# Altium PCB 175-00033, rev3, Crate Slot Power Interface .PcbDoc (part 1 of 2)
Units mm, origin at the board's own origin, x right, y up, seen from the top; angles counter-clockwise.
Board outline 152 x 100 mm, 4 copper layers (Top Layer (*.GTL), Internal Plane 1 (*.GP1), Internal Plane 2 (*.GP2), Bottom Layer (*GBL)); 20 components, 15 nets, 1077 pads, 24 vias.
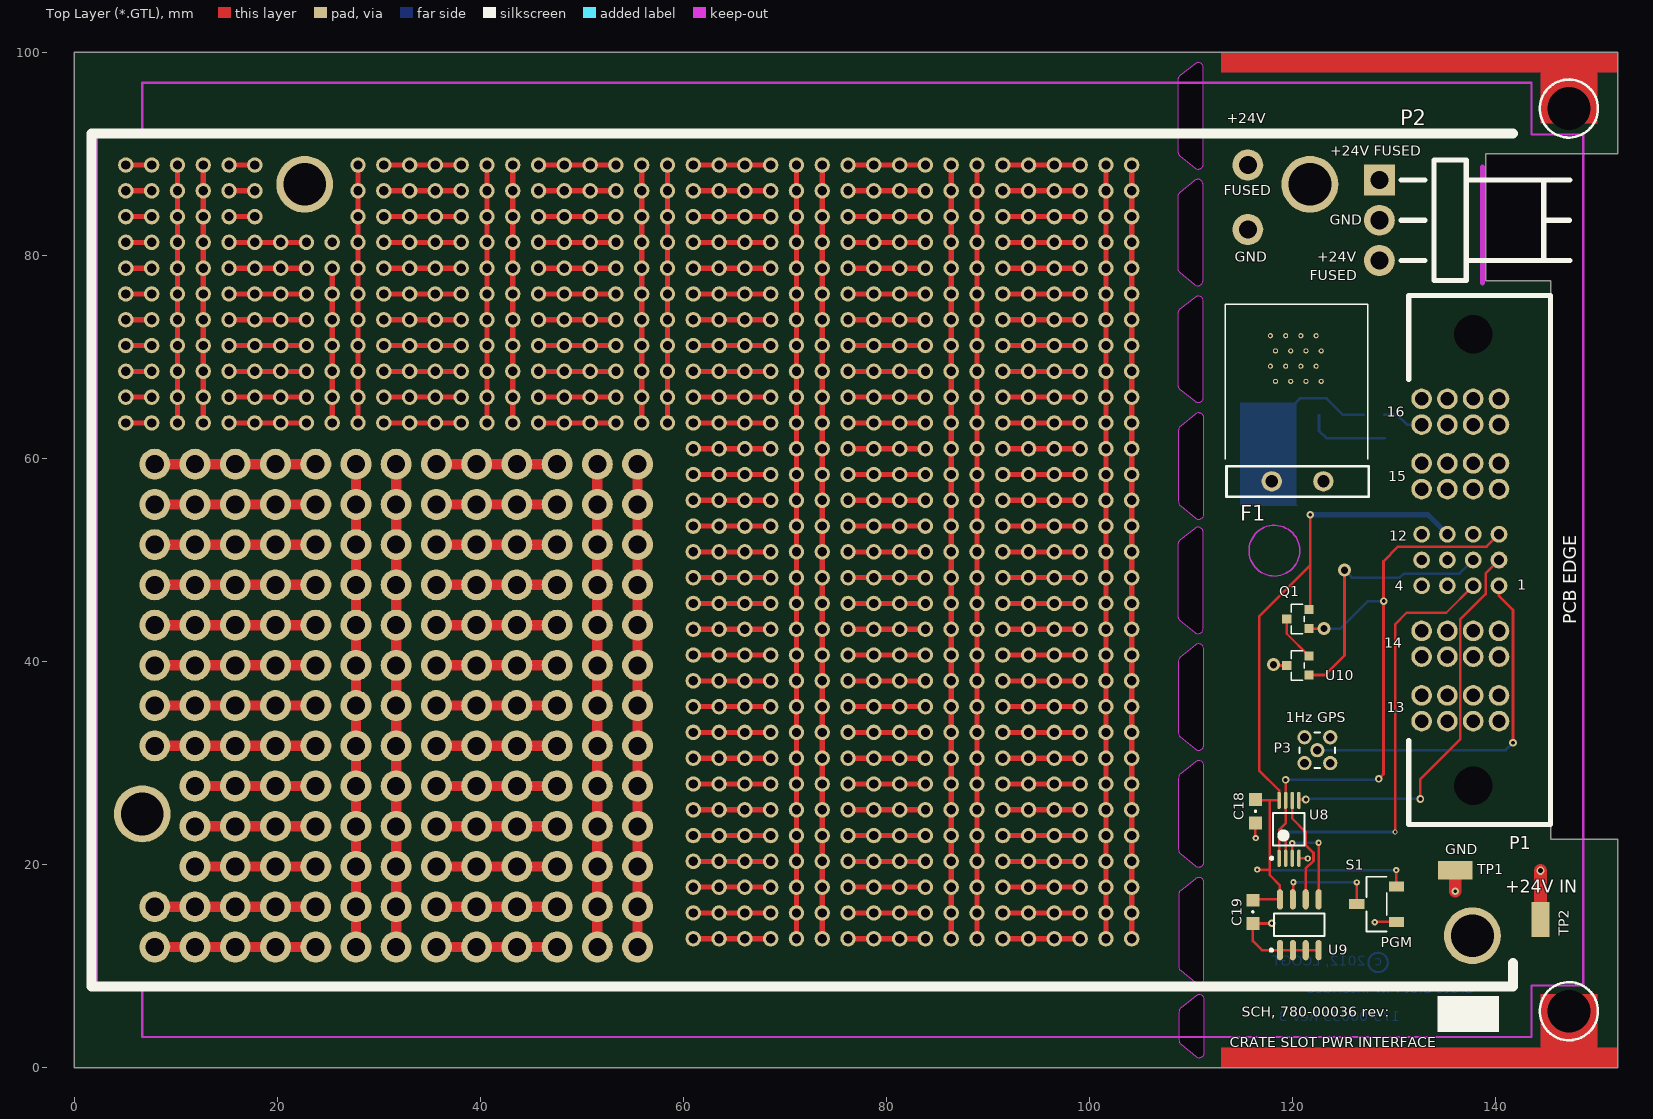
[diagram p0: Top Layer (*.GTL) view]
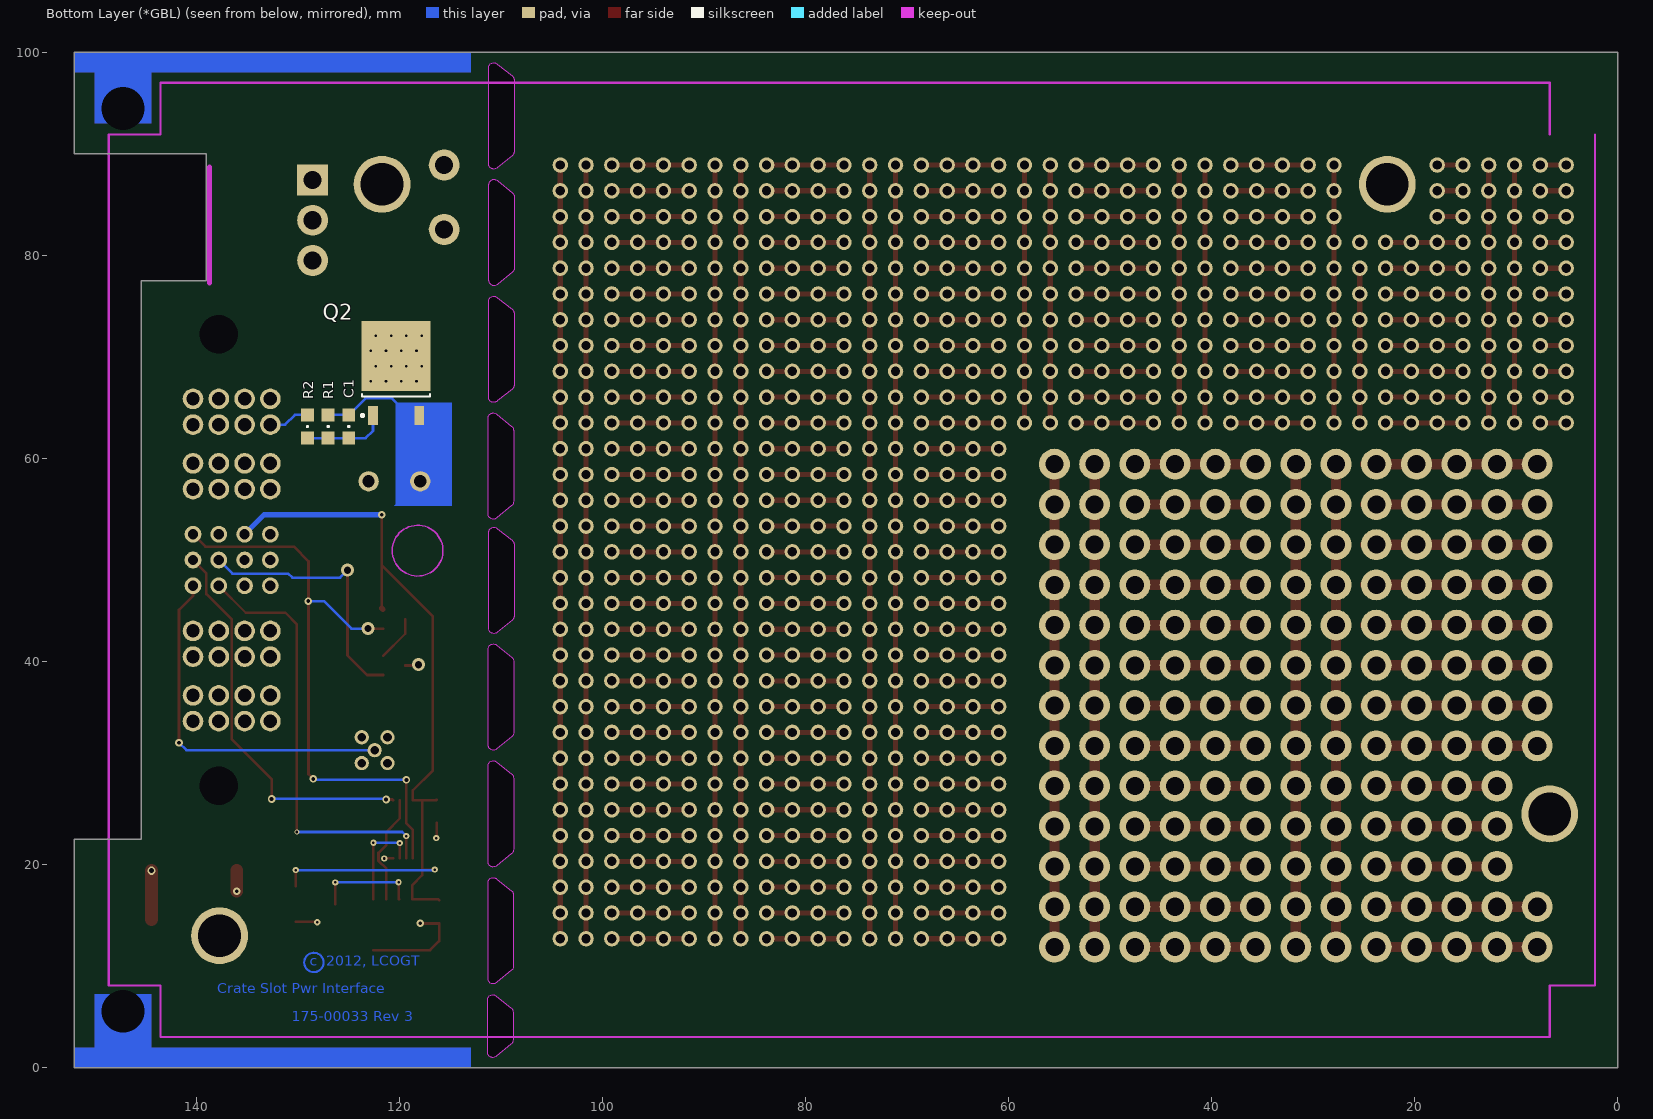
[diagram p1: Bottom Layer (*GBL) view, seen from below]
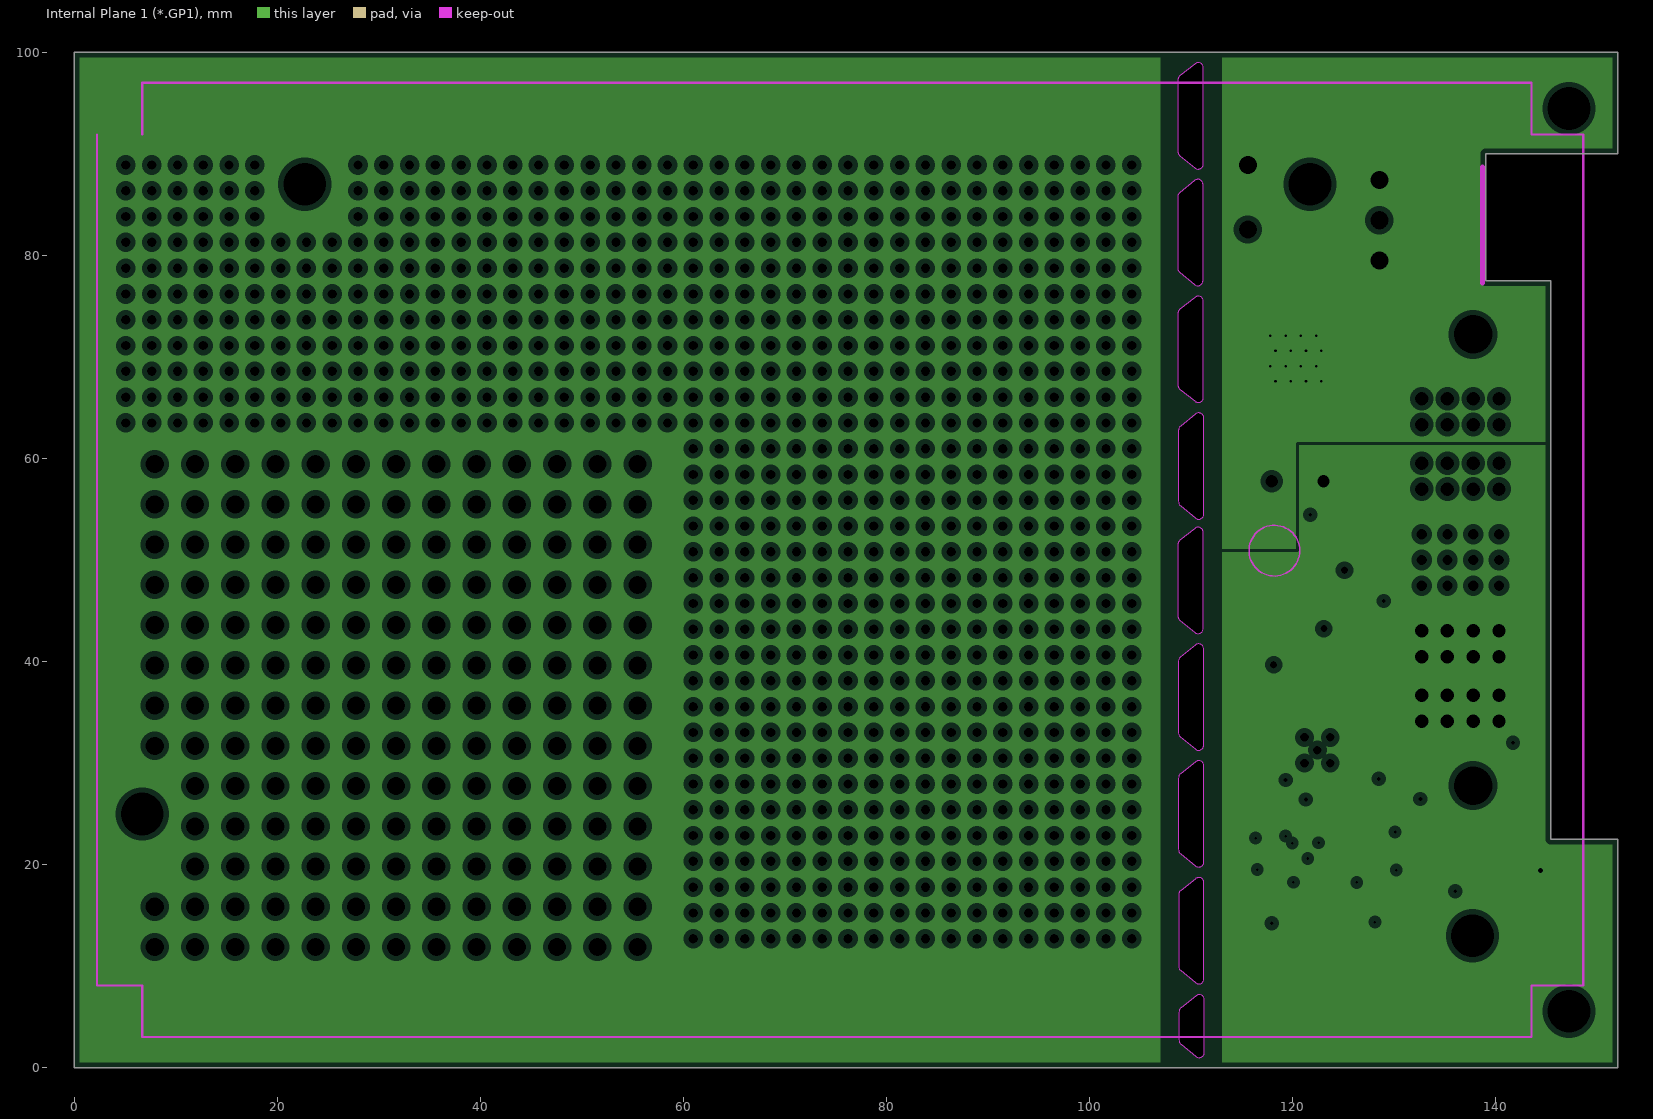
[diagram p2: Internal Plane 1 (*.GP1), clearances drawn from the general rule]
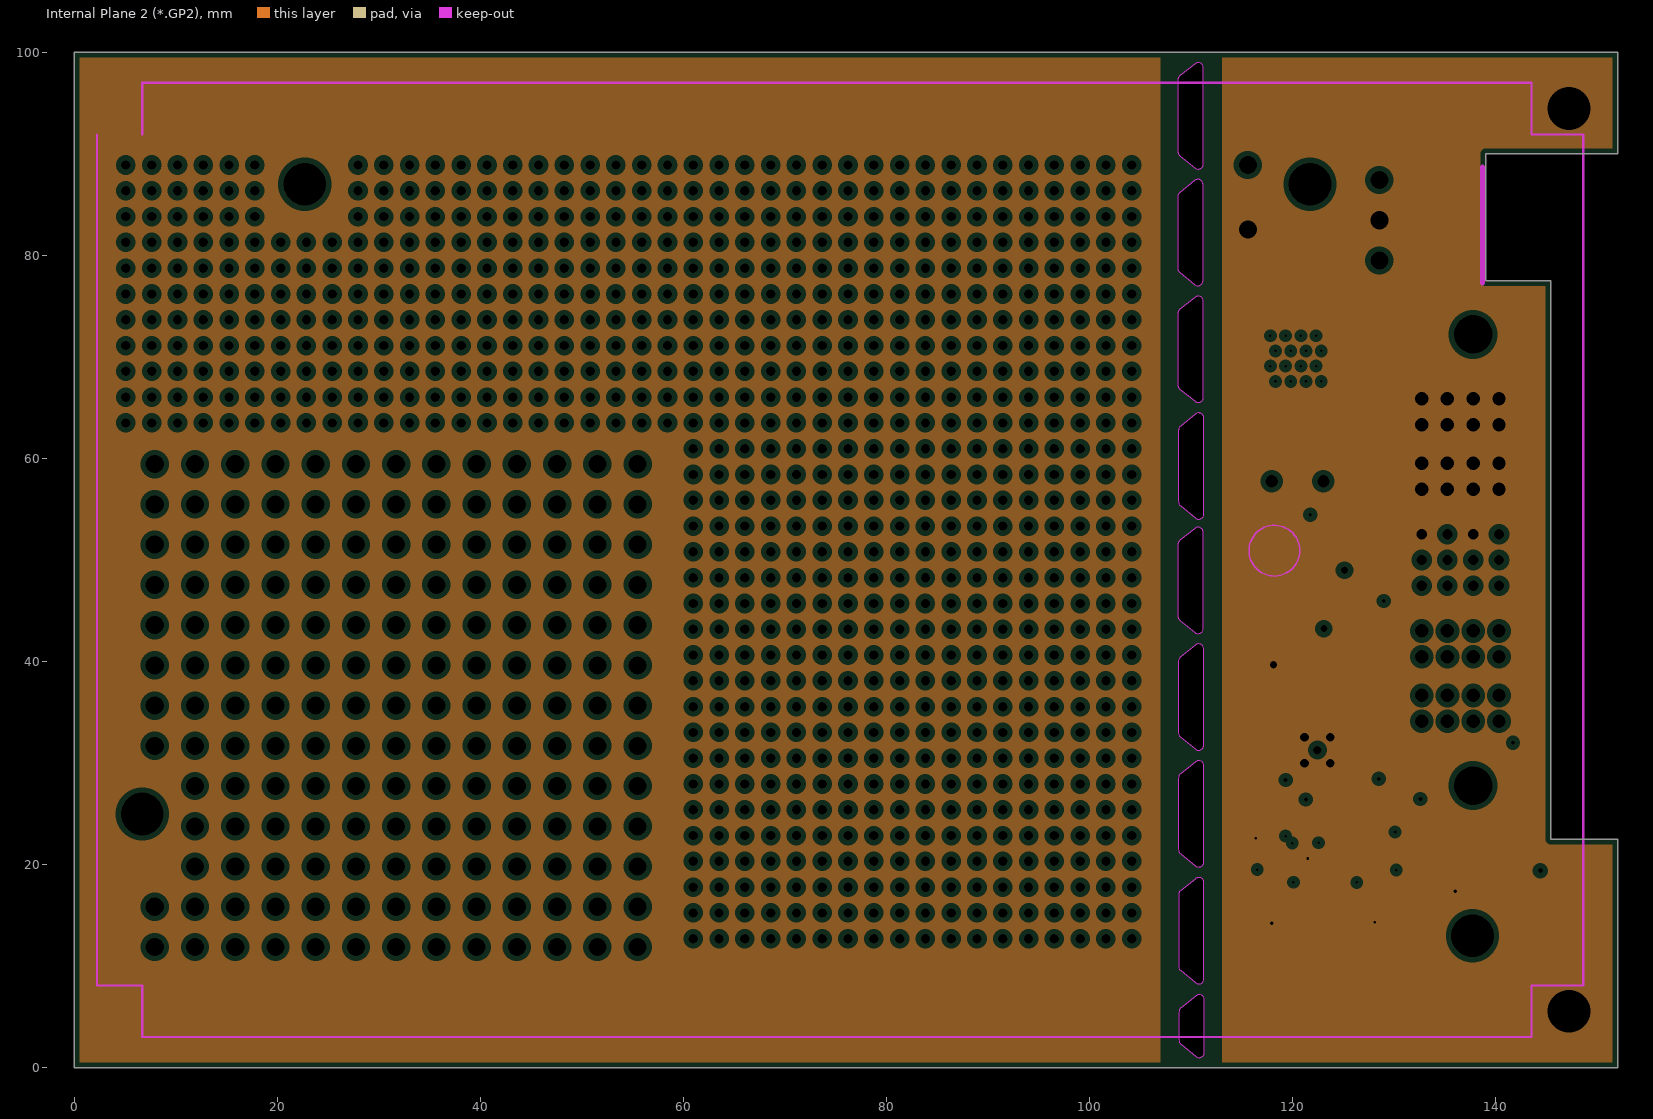
[diagram p3: Internal Plane 2 (*.GP2), clearances drawn from the general rule]

## Layer stack, top to bottom
Top Layer (*.GTL): signal copper 0.0356
Dielectric: core 0.32, FR-4, Dk 4.8
Internal Plane 1 (*.GP1): plane copper 0.0356, net (Multiple Nets)
Dielectric: prepreg 0.32, FR-4, Dk 4.8
Internal Plane 2 (*.GP2): plane copper 0.0356, net GND
Dielectric: core 0.32, FR-4, Dk 4.8
Bottom Layer (*GBL): signal copper 0.0356

## Board outline
0,0 0,100 152,100 152,90 139,90 139,77.5 145.4,77.5 145.4,22.5 152,22.5 152,0
cut-out: 108.691,90.25 ccw(c109.19,90.225) 108.893,89.824 110.335,88.648 ccw(c110.69,89) 111.19,89 111.19,98.475 ccw(c110.69,98.475) 110.335,98.828 108.893,97.672 ccw(c109.19,97.27) 108.691,97.245 108.69,97.245
cut-out: 108.662,78.762 ccw(c109.161,78.738) 108.864,78.336 110.306,77.16 ccw(c110.661,77.513) 111.161,77.513 111.161,86.988 ccw(c110.661,86.988) 110.306,87.34 108.864,86.184 ccw(c109.161,85.782) 108.662,85.757 108.661,85.757
cut-out: 108.691,67.262 ccw(c109.19,67.238) 108.893,66.836 110.335,65.66 ccw(c110.69,66.012) 111.19,66.012 111.19,75.487 ccw(c110.69,75.487) 110.335,75.84 108.893,74.684 ccw(c109.19,74.282) 108.691,74.257 108.69,74.257
cut-out: 108.746,55.762 ccw(c109.245,55.738) 108.948,55.336 110.39,54.16 ccw(c110.745,54.512) 111.245,54.512 111.245,63.987 ccw(c110.745,63.987) 110.39,64.34 108.948,63.184 ccw(c109.245,62.782) 108.746,62.757 108.745,62.757
cut-out: 108.686,44.503 ccw(c109.185,44.478) 108.888,44.076 110.33,42.9 ccw(c110.685,43.253) 111.185,43.253 111.185,52.728 ccw(c110.685,52.728) 110.33,53.08 108.888,51.924 ccw(c109.185,51.522) 108.686,51.497 108.685,51.497
cut-out: 108.731,33.012 ccw(c109.231,32.988) 108.933,32.586 110.376,31.41 ccw(c110.731,31.763) 111.231,31.763 111.231,41.238 ccw(c110.731,41.238) 110.376,41.59 108.933,40.434 ccw(c109.231,40.032) 108.731,40.007
cut-out: 108.746,21.512 ccw(c109.245,21.488) 108.948,21.086 110.39,19.91 ccw(c110.745,20.262) 111.245,20.262 111.245,29.737 ccw(c110.745,29.737) 110.39,30.09 108.948,28.934 ccw(c109.245,28.532) 108.746,28.507 108.745,28.507
cut-out: 108.753,10.003 ccw(c109.252,9.978) 108.955,9.576 110.398,8.4 ccw(c110.752,8.753) 111.252,8.753 111.252,18.228 ccw(c110.752,18.228) 110.398,18.58 108.955,17.424 ccw(c109.252,17.022) 108.753,16.997 108.752,16.997
cut-out: 108.795,2.746 ccw(c109.295,2.721) 108.997,2.319 110.44,1.143 ccw(c110.795,1.496) 111.295,1.496 111.295,6.691 ccw(c110.795,6.691) 110.44,7.044 108.997,5.887 ccw(c109.295,5.486) 108.795,5.461

## Design rules (kind name [scope] priority, off if disabled: settings)
Clearance [All] p1: gap=0.127
HoleSize [All] p1: absolutevalues=TRUE maxlimit=12.7 minlimit=0.025 maxpercent=80.000 minpercent=20.000
HoleToHoleClearance [All] p1: gap=0.076 allowstackedmicrovias=TRUE
MinimumSolderMaskSliver [All] p1: minsoldermaskwidth=0.051
PlaneClearance [All] p1: clearance=0.508
PlaneConnect [All] p1: planeconnectstyle=Direct reliefexpansion=0.508 reliefentries=4 reliefconductorwidth=0.254 reliefairgap=0.254
PolygonConnect [All] p1: connectstyle=Relief reliefconductorwidth=0.254 reliefentries=4 polygonreliefangle="90 Angle"
RoomDefinition "780-00036, rev3, Sch, Crate Slot Power Interface" [InComponentClass('780-00036, rev3, Sch, Crate Slot Power Interface')] p1: confinementstyle=ConfineIn formatcopy=TRUE lockcomponents=FALSE outline -37,-17 186.5,-17 186.5,131 -37,131
RoutingVias [All] p1: holewidth=0.254 width=0.508 viastyle="Through Hole" minholewidth=0.254 minwidth=0.508 maxholewidth=1.27 maxwidth=1.27
SilkToSilkClearance [All] p1: silktosilkclearance=0.051
SilkscreenOverComponentPads [All] p1: minsilkscreentomaskgap=0.051
SolderMaskExpansion [All] p1: expansion=0.102
Width [All] p1: maxlimit=2.54 minlimit=0.203 preferedwidth=0.254
21 further rules are at their usual default settings.

## Classes and differential pairs
component class "780-00036, rev3, Sch, Crate Slot Power Interface": +24V C1 C18 C19 F1 P1 P2 P3 Q1 Q2 R1 R2 S1 TP1 TP2 U8 U9 U10

## Components (designator, comment, footprint, x,y, rotation, side; value= is the part's Value field where it differs from the comment)
C1 "Cap SMD" SMD_0805 124.968,63.142 r90 bottom
C18 "Cap SMD" SMD_0805 116.323,25.253 r270 top
C19 "Cap SMD" SMD_0805 116.069,15.347 r270 top
Designator59 "Comment" "TARGET MECHANICAL 5" -22.047,124.333 r180 bottom
Designator60 "Comment" "TARGET MECHANICAL 5" -18.923,-41.173 r180 bottom
Designator61 "Comment" "TARGET MECHANICAL 5" 155.778,122.86 r180 bottom
F1 "RUEF400" "PolySwitch Radial 0.2" 120.472,57.747 r180 top
P1 "PETC-02-12-02--01-S-RA-SD" PETC-02-12-02-01-RA 136.5,50 r0 top locked
P2 "Header 3" "HDR 1X3 0.156\" - RT ANGLE" 128.532,87.425 r270 top
P3 "COAX MMCX" MMCX2.54-V5 122.42,31.27 r90 top
Q1 "FDV304P" SMD_SOT23_3 120.5,44.185 r90 top
Q2 "IRF5303P" "TO-252(D-PAK)  PowerPAD" 120.3,68.588 r90 bottom
R1 "Res 0805" SMD_0805 127,63.142 r90 bottom
R2 "Res 0805" SMD_0805 129.032,63.142 r270 bottom
S1 "CJS-1200TB" CAS-120B 128.261,16.109 r90 top
TP1 "Test Point SMD" "SMD_TEST POINT" 136,19.443 r180 top
TP2 "Test Point SMD" "SMD_TEST POINT" 144.39,14.58 r90 top
U8 "SN74CBT3306PWLE" PW008_N 119.625,23.475 r90 top
U9 "M24C32RMN1" SOP8_N 120.641,14.077 r90 top
U10 "DS2411" SMD_SOT23_3 120.5,39.613 r90 top

## Footprints (in the part's own frame and the unit in brackets; to place one, negate y for a bottom-side part, rotate by r counter-clockwise, add the part's x,y. Pads: shape width x height; smd on the part's side, far side on the other; paste and mask are expansions set on the pad)
CAS-120B [mm] "Copal Electronics CAS SMD Slide Switch"
  rect 1x1.5 smd: 1(-1.75,-1.95) 2(0,1.95) 3(1.75,-1.95)
  silkscreen extent -2.69,-1 2.69,1
"HDR 1X3 0.156\" - RT ANGLE" [mil] "Connector; Header; 3 Position, RT Angle"
  rect 120x120 hole 70: 1(0,0)
  round 120 hole 70: 2(156,0) 3(312,0)
  Keep-Out Layer lines w20: 400,400 -50,400
  silkscreen extent -78,85 390,739
MMCX2.54-V5 [mm] "Connector; RF Coaxial, MMCX, Thru-Hole; 5 Position; Vertical"
  round 1.4 hole 0.85: 1(0,0) 2(-1.27,-1.27) 3(1.27,-1.27) 4(1.27,1.27) 5(-1.27,1.27)
  silkscreen extent -1.75,-1.75 1.75,1.75
PETC-02-12-02-01-RA [mil] "Samtec Male Pins, PWR(4), Signal(12), Right Angle"
  round 59.06 hole 150 unplated: 0(50,-875) 0(50,875)
  round 65 hole 40: 1(150,-100) 2(50,-100) 3(-50,-100) 4(-150,-100) 5(150,0) 6(50,0) 7(-50,0) 8(-150,0) 9(150,100) 10(50,100) 11(-50,100) 12(-150,100)
  round 80 hole 52: 13(-150,-625) 13(-150,-525) 13(-50,-625) 13(-50,-525) 13(50,-625) 13(50,-525) 13(150,-625) 13(150,-525) 14(-150,-375) 14(-150,-275) 14(-50,-375) 14(-50,-275) 14(50,-375) 14(50,-275) 14(150,-375) 14(150,-275) 15(-150,275) 15(-150,375) 15(-50,275) 15(-50,375) 15(50,275) 15(50,375) 15(150,275) 15(150,375) 16(-150,525) 16(-150,625) 16(-50,525) 16(-50,625) 16(50,525) 16(50,625) 16(150,525) 16(150,625)
  silkscreen extent -200,-1025 350,1025
"PolySwitch Radial 0.2" [mm] "PolySwitch footprint"
  round 2 hole 1.2: 1(-2.54,0) 2(2.54,0)
  silkscreen extent -7,-1.5 7,1.5
PW008_N [mm] "SOP, 8-Leads, Body 3x4.4mm, Pitch 0.65mm, IPC Medium Density"
  oval 1.7x0.35 smd: 1(-2.85,0.975) 2(-2.85,0.325) 3(-2.85,-0.325) 4(-2.85,-0.975) 5(2.85,-0.975) 6(2.85,-0.325) 7(2.85,0.325) 8(2.85,0.975)
  silkscreen extent -2.97,-1.55 1.6,1.82, body extent -2.25,-1.55 2.25,1.55, height 3.1
SMD_0805 [mil]
  rect 50x50 smd: 1(-45,0) 2(45,0)
  silkscreen extent -1,-1 1,1
SMD_SOT23_3 [mil]
  rect 36x36 smd: 1(-37,-43) 2(37,-43) 3(0,43)
  silkscreen extent -57,-25 57,25
"SMD_TEST POINT" [mil] "Keystone 5015"
  rect 135x70 smd: 1(0,0)
SOP8_N [mm] "SOIC, 8-Leads, Body 4.9x3.9mm, Pitch 1.27mm, IPC Medium Density"
  oval 2x0.6 smd: 1(-2.5,1.905) 2(-2.5,0.635) 3(-2.5,-0.635) 4(-2.5,-1.905) 5(2.5,-1.905) 6(2.5,-0.635) 7(2.5,0.635) 8(2.5,1.905)
  silkscreen extent -2.62,-2.5 1.1,2.88, body extent -2,-2.5 2,2.5, height 1.75
"TARGET MECHANICAL 5" [mm]
"TO-252(D-PAK)  PowerPAD" [mil] "D-PAK, 3-Pads, Body 6.2x6.7mm (max), IPC Medium Density"
  rect 74.8x37.4 smd: 1(-171.26,89.76) 3(-171.26,-89.76)
  round 20 hole 10: 2(-39.37,-78.74) 2(-39.37,-19.69) 2(-39.37,39.37) 2(-39.37,98.43) 2(19.68,-98.43) 2(19.68,-39.37) 2(19.68,19.68) 2(19.68,78.74) 2(78.74,-78.74) 2(78.74,-19.69) 2(78.74,39.37) 2(78.74,98.43) 2(137.8,-98.43) 2(137.8,-39.37) 2(137.8,19.68) 2(137.8,78.74)
  rect 271.65x267.72 smd: 2(59.06,0)
  silkscreen extent -176,-132 -88,135, body extent -98,-132 146,132, height 94

## Part data
C1 C18 C19: "Capacitor"
F1: library part "Fuse Thermal", "PolySwitch RUE Series"
P1: "SAMTEC, SIGNAL(12)+PWR(4)"
P2: library part "Header 3, 0.156 RT ANGLE", "Header, 3-Pin, 0.156, RT ANGLE"
P3: library part COAX-M, "RF Coaxial PCB Connector, MMCX; Thru-Hole, Vertical Mount Plug,  50 Ohm Impedance"
Q1: "P-MOSFET LOGIC LEVEL"
Q2: "P-Chan MOSFET"
R1 R2: library part "Res SMD", "Resistor 0805"
S1: library part SW_SPDT_DOUG
TP1 TP2: "SMD loop test point"
U8: "Dual FET Bus Switch"
U9: "32 Kbit Serial I²C Bus EEPROM"
U10: "Silicon Serial Number"

## Free pads (board coordinates)
  round 1.524 hole 0.914: 0(5.08,63.5) 0(5.08,66.04) 0(5.08,68.58) 0(5.08,71.12) 0(5.08,73.66) 0(5.08,76.2) 0(5.08,78.74) 0(5.08,81.28) 0(5.08,83.82) 0(5.08,86.36) 0(5.08,88.9) 0(7.62,63.5) 0(7.62,66.04) 0(7.62,68.58) 0(7.62,71.12) 0(7.62,73.66) 0(7.62,76.2) 0(7.62,78.74) 0(7.62,81.28) 0(7.62,83.82) 0(7.62,86.36) 0(7.62,88.9) 0(10.16,63.5) 0(10.16,66.04) 0(10.16,68.58) 0(10.16,71.12) 0(10.16,73.66) 0(10.16,76.2) 0(10.16,78.74) 0(10.16,81.28) 0(10.16,83.82) 0(10.16,86.36) 0(10.16,88.9) 0(12.7,63.5) 0(12.7,66.04) 0(12.7,68.58) 0(12.7,71.12) 0(12.7,73.66) 0(12.7,76.2) 0(12.7,78.74) 0(12.7,81.28) 0(12.7,83.82) 0(12.7,86.36) 0(12.7,88.9) 0(15.24,63.5) 0(15.24,66.04) 0(15.24,68.58) 0(15.24,71.12) 0(15.24,73.66) 0(15.24,76.2) 0(15.24,78.74) 0(15.24,81.28) 0(15.24,83.82) 0(15.24,86.36) 0(15.24,88.9) 0(17.78,63.5) 0(17.78,66.04) 0(17.78,68.58) 0(17.78,71.12) 0(17.78,73.66) 0(17.78,76.2) 0(17.78,78.74) 0(17.78,81.28) 0(17.78,83.82) 0(17.78,86.36) 0(17.78,88.9) 0(20.32,63.5) 0(20.32,66.04) 0(20.32,68.58) 0(20.32,71.12) 0(20.32,73.66) 0(20.32,76.2) 0(20.32,78.74) 0(20.32,81.28) 0(22.86,63.5) 0(22.86,66.04) 0(22.86,68.58) 0(22.86,71.12) 0(22.86,73.66) 0(22.86,76.2) 0(22.86,78.74) 0(22.86,81.28) 0(25.4,63.5) 0(25.4,66.04) 0(25.4,68.58) 0(25.4,71.12) 0(25.4,73.66) 0(25.4,76.2) 0(25.4,78.74) 0(25.4,81.28) 0(27.94,63.5) 0(27.94,66.04) 0(27.94,68.58) 0(27.94,71.12) 0(27.94,73.66) 0(27.94,76.2) 0(27.94,78.74) 0(27.94,81.28) 0(27.94,83.82) 0(27.94,86.36) 0(27.94,88.9) 0(30.48,63.5) 0(30.48,66.04) 0(30.48,68.58) 0(30.48,71.12) 0(30.48,73.66) 0(30.48,76.2) 0(30.48,78.74) 0(30.48,81.28) 0(30.48,83.82) 0(30.48,86.36) 0(30.48,88.9) 0(33.02,63.5) 0(33.02,66.04) 0(33.02,68.58) 0(33.02,71.12) 0(33.02,73.66) 0(33.02,76.2) 0(33.02,78.74) 0(33.02,81.28) 0(33.02,83.82) 0(33.02,86.36) 0(33.02,88.9) 0(35.56,63.5) 0(35.56,66.04) 0(35.56,68.58) 0(35.56,71.12) 0(35.56,73.66) 0(35.56,76.2) 0(35.56,78.74) 0(35.56,81.28) 0(35.56,83.82) 0(35.56,86.36) 0(35.56,88.9) 0(38.1,63.5) 0(38.1,66.04) 0(38.1,68.58) 0(38.1,71.12) 0(38.1,73.66) 0(38.1,76.2) 0(38.1,78.74) 0(38.1,81.28) 0(38.1,83.82) 0(38.1,86.36) 0(38.1,88.9) 0(40.64,63.5) 0(40.64,66.04) 0(40.64,68.58) 0(40.64,71.12) 0(40.64,73.66) 0(40.64,76.2) 0(40.64,78.74) 0(40.64,81.28) 0(40.64,83.82) 0(40.64,86.36) 0(40.64,88.9) 0(43.18,63.5) 0(43.18,66.04) 0(43.18,68.58) 0(43.18,71.12) 0(43.18,73.66) 0(43.18,76.2) 0(43.18,78.74) 0(43.18,81.28) 0(43.18,83.82) 0(43.18,86.36) 0(43.18,88.9) 0(45.72,63.5) 0(45.72,66.04) 0(45.72,68.58) 0(45.72,71.12) 0(45.72,73.66) 0(45.72,76.2) 0(45.72,78.74) 0(45.72,81.28) 0(45.72,83.82) 0(45.72,86.36) 0(45.72,88.9) 0(48.26,63.5) 0(48.26,66.04) 0(48.26,68.58) 0(48.26,71.12) 0(48.26,73.66) 0(48.26,76.2) 0(48.26,78.74) 0(48.26,81.28) 0(48.26,83.82) 0(48.26,86.36) 0(48.26,88.9) 0(50.8,63.5) 0(50.8,66.04) 0(50.8,68.58) 0(50.8,71.12) 0(50.8,73.66) 0(50.8,76.2) 0(50.8,78.74) 0(50.8,81.28) 0(50.8,83.82) 0(50.8,86.36) 0(50.8,88.9) 0(53.34,63.5) 0(53.34,66.04) 0(53.34,68.58) 0(53.34,71.12) 0(53.34,73.66) 0(53.34,76.2) 0(53.34,78.74) 0(53.34,81.28) 0(53.34,83.82) 0(53.34,86.36) 0(53.34,88.9) 0(55.88,63.5) 0(55.88,66.04) 0(55.88,68.58) 0(55.88,71.12) 0(55.88,73.66) 0(55.88,76.2) 0(55.88,78.74) 0(55.88,81.28) 0(55.88,83.82) 0(55.88,86.36) 0(55.88,88.9) 0(58.42,63.5) 0(58.42,66.04) 0(58.42,68.58) 0(58.42,71.12) 0(58.42,73.66) 0(58.42,76.2) 0(58.42,78.74) 0(58.42,81.28) 0(58.42,83.82) 0(58.42,86.36) 0(58.42,88.9) 0(60.96,12.7) 0(60.96,15.24) 0(60.96,17.78) 0(60.96,20.32) 0(60.96,22.86) 0(60.96,25.4) 0(60.96,27.94) 0(60.96,30.48) 0(60.96,33.02) 0(60.96,35.56) 0(60.96,38.1) 0(60.96,40.64) 0(60.96,43.18) 0(60.96,45.72) 0(60.96,48.26) 0(60.96,50.8) 0(60.96,53.34) 0(60.96,55.88) 0(60.96,58.42) 0(60.96,60.96) 0(60.96,63.5) 0(60.96,66.04) 0(60.96,68.58) 0(60.96,71.12) 0(60.96,73.66) 0(60.96,76.2) 0(60.96,78.74) 0(60.96,81.28) 0(60.96,83.82) 0(60.96,86.36) 0(60.96,88.9) 0(63.5,12.7) 0(63.5,15.24) 0(63.5,17.78) 0(63.5,20.32) 0(63.5,22.86) 0(63.5,25.4) 0(63.5,27.94) 0(63.5,30.48) 0(63.5,33.02) 0(63.5,35.56) 0(63.5,38.1) 0(63.5,40.64) 0(63.5,43.18) 0(63.5,45.72) 0(63.5,48.26) 0(63.5,50.8) 0(63.5,53.34) 0(63.5,55.88) 0(63.5,58.42) 0(63.5,60.96) 0(63.5,63.5) 0(63.5,66.04) 0(63.5,68.58) 0(63.5,71.12) 0(63.5,73.66) 0(63.5,76.2) 0(63.5,78.74) 0(63.5,81.28) 0(63.5,83.82) 0(63.5,86.36) 0(63.5,88.9) 0(66.04,12.7) 0(66.04,15.24) 0(66.04,17.78) 0(66.04,20.32) 0(66.04,22.86) 0(66.04,25.4) 0(66.04,27.94) 0(66.04,30.48) 0(66.04,33.02) 0(66.04,35.56) 0(66.04,38.1) 0(66.04,40.64) 0(66.04,43.18) 0(66.04,45.72) 0(66.04,48.26) 0(66.04,50.8) 0(66.04,53.34) 0(66.04,55.88) 0(66.04,58.42) 0(66.04,60.96) 0(66.04,63.5) 0(66.04,66.04) 0(66.04,68.58) 0(66.04,71.12) 0(66.04,73.66) 0(66.04,76.2) 0(66.04,78.74) 0(66.04,81.28) 0(66.04,83.82) 0(66.04,86.36) 0(66.04,88.9) 0(68.58,12.7) 0(68.58,15.24) 0(68.58,17.78) 0(68.58,20.32) 0(68.58,22.86) 0(68.58,25.4) 0(68.58,27.94) 0(68.58,30.48) 0(68.58,33.02) 0(68.58,35.56) 0(68.58,38.1) 0(68.58,40.64) 0(68.58,43.18) 0(68.58,45.72) 0(68.58,48.26) 0(68.58,50.8) 0(68.58,53.34) 0(68.58,55.88) 0(68.58,58.42) 0(68.58,60.96) 0(68.58,63.5) 0(68.58,66.04) 0(68.58,68.58) 0(68.58,71.12) 0(68.58,73.66) 0(68.58,76.2) 0(68.58,78.74) 0(68.58,81.28) 0(68.58,83.82) 0(68.58,86.36) 0(68.58,88.9) 0(71.12,12.7) 0(71.12,15.24) 0(71.12,17.78) 0(71.12,20.32) 0(71.12,22.86) 0(71.12,25.4) 0(71.12,27.94) 0(71.12,30.48) 0(71.12,33.02) 0(71.12,35.56) 0(71.12,38.1) 0(71.12,40.64) 0(71.12,43.18) 0(71.12,45.72) 0(71.12,48.26) 0(71.12,50.8) 0(71.12,53.34) 0(71.12,55.88) 0(71.12,58.42) 0(71.12,60.96) 0(71.12,63.5) 0(71.12,66.04) 0(71.12,68.58) 0(71.12,71.12) 0(71.12,73.66) 0(71.12,76.2) 0(71.12,78.74) 0(71.12,81.28) 0(71.12,83.82) 0(71.12,86.36) 0(71.12,88.9) 0(73.66,12.7) 0(73.66,15.24) 0(73.66,17.78) 0(73.66,20.32) 0(73.66,22.86) 0(73.66,25.4) 0(73.66,27.94) 0(73.66,30.48) 0(73.66,33.02) 0(73.66,35.56) 0(73.66,38.1) 0(73.66,40.64) 0(73.66,43.18) 0(73.66,45.72) 0(73.66,48.26) 0(73.66,50.8) 0(73.66,53.34) 0(73.66,55.88) 0(73.66,58.42) 0(73.66,60.96) 0(73.66,63.5) 0(73.66,66.04) 0(73.66,68.58) 0(73.66,71.12) 0(73.66,73.66) 0(73.66,76.2) 0(73.66,78.74) 0(73.66,81.28) 0(73.66,83.82) 0(73.66,86.36) 0(73.66,88.9) 0(76.2,12.7) 0(76.2,15.24) 0(76.2,17.78) 0(76.2,20.32) 0(76.2,22.86) 0(76.2,25.4) 0(76.2,27.94) 0(76.2,30.48) 0(76.2,33.02) 0(76.2,35.56) 0(76.2,38.1) 0(76.2,40.64) 0(76.2,43.18) 0(76.2,45.72) 0(76.2,48.26) 0(76.2,50.8) 0(76.2,53.34) 0(76.2,55.88) 0(76.2,58.42) 0(76.2,60.96) 0(76.2,63.5) 0(76.2,66.04) 0(76.2,68.58) 0(76.2,71.12) 0(76.2,73.66) 0(76.2,76.2) 0(76.2,78.74) 0(76.2,81.28) 0(76.2,83.82) 0(76.2,86.36) 0(76.2,88.9) 0(78.74,12.7) 0(78.74,15.24) 0(78.74,17.78) 0(78.74,20.32) 0(78.74,22.86) 0(78.74,25.4) 0(78.74,27.94) 0(78.74,30.48) 0(78.74,33.02) 0(78.74,35.56) 0(78.74,38.1) 0(78.74,40.64) 0(78.74,43.18) 0(78.74,45.72) 0(78.74,48.26) 0(78.74,50.8) 0(78.74,53.34) 0(78.74,55.88) 0(78.74,58.42) 0(78.74,60.96) 0(78.74,63.5) 0(78.74,66.04) 0(78.74,68.58) 0(78.74,71.12) 0(78.74,73.66) 0(78.74,76.2) 0(78.74,78.74) 0(78.74,81.28) 0(78.74,83.82) 0(78.74,86.36) 0(78.74,88.9) 0(81.28,12.7) 0(81.28,15.24) 0(81.28,17.78) 0(81.28,20.32) 0(81.28,22.86) 0(81.28,25.4) 0(81.28,27.94) 0(81.28,30.48) 0(81.28,33.02) 0(81.28,35.56) 0(81.28,38.1) 0(81.28,40.64) 0(81.28,43.18) 0(81.28,45.72) 0(81.28,48.26) 0(81.28,50.8) 0(81.28,53.34) 0(81.28,55.88) 0(81.28,58.42) 0(81.28,60.96) 0(81.28,63.5) 0(81.28,66.04) 0(81.28,68.58) 0(81.28,71.12) 0(81.28,73.66) 0(81.28,76.2) 0(81.28,78.74) 0(81.28,81.28) 0(81.28,83.82) 0(81.28,86.36) 0(81.28,88.9) 0(83.82,12.7) 0(83.82,15.24) 0(83.82,17.78) 0(83.82,20.32) 0(83.82,22.86) 0(83.82,25.4) 0(83.82,27.94) 0(83.82,30.48) 0(83.82,33.02) 0(83.82,35.56) 0(83.82,38.1) 0(83.82,40.64) 0(83.82,43.18) 0(83.82,45.72) 0(83.82,48.26) 0(83.82,50.8) 0(83.82,53.34) 0(83.82,55.88) 0(83.82,58.42) 0(83.82,60.96) 0(83.82,63.5) 0(83.82,66.04) 0(83.82,68.58) 0(83.82,71.12) 0(83.82,73.66) 0(83.82,76.2) 0(83.82,78.74) 0(83.82,81.28) 0(83.82,83.82) 0(83.82,86.36) 0(83.82,88.9) 0(86.36,12.7) 0(86.36,15.24) 0(86.36,17.78) 0(86.36,20.32) 0(86.36,22.86) 0(86.36,25.4) 0(86.36,27.94) 0(86.36,30.48) 0(86.36,33.02) 0(86.36,35.56) 0(86.36,38.1) 0(86.36,40.64) 0(86.36,43.18) 0(86.36,45.72) 0(86.36,48.26) 0(86.36,50.8) 0(86.36,53.34) 0(86.36,55.88) 0(86.36,58.42) 0(86.36,60.96) 0(86.36,63.5) 0(86.36,66.04) 0(86.36,68.58) 0(86.36,71.12) 0(86.36,73.66) 0(86.36,76.2) 0(86.36,78.74) 0(86.36,81.28) 0(86.36,83.82) 0(86.36,86.36) 0(86.36,88.9) 0(88.9,12.7) 0(88.9,15.24) 0(88.9,17.78) 0(88.9,20.32) 0(88.9,22.86) 0(88.9,25.4) 0(88.9,27.94) 0(88.9,30.48) 0(88.9,33.02) 0(88.9,35.56) 0(88.9,38.1) 0(88.9,40.64) 0(88.9,43.18) 0(88.9,45.72) 0(88.9,48.26) 0(88.9,50.8) 0(88.9,53.34) 0(88.9,55.88) 0(88.9,58.42) 0(88.9,60.96) 0(88.9,63.5) 0(88.9,66.04) 0(88.9,68.58) 0(88.9,71.12) 0(88.9,73.66) 0(88.9,76.2) 0(88.9,78.74) 0(88.9,81.28) 0(88.9,83.82) 0(88.9,86.36) 0(88.9,88.9) 0(91.44,12.7) 0(91.44,15.24) 0(91.44,17.78) 0(91.44,20.32) 0(91.44,22.86) 0(91.44,25.4) 0(91.44,27.94) 0(91.44,30.48) 0(91.44,33.02) 0(91.44,35.56) 0(91.44,38.1) 0(91.44,40.64) 0(91.44,43.18) 0(91.44,45.72) 0(91.44,48.26) 0(91.44,50.8) 0(91.44,53.34) 0(91.44,55.88) 0(91.44,58.42) 0(91.44,60.96) 0(91.44,63.5) 0(91.44,66.04) 0(91.44,68.58) 0(91.44,71.12) 0(91.44,73.66) 0(91.44,76.2) 0(91.44,78.74) 0(91.44,81.28) 0(91.44,83.82) 0(91.44,86.36) 0(91.44,88.9) 0(93.98,12.7) 0(93.98,15.24) 0(93.98,17.78) 0(93.98,20.32) 0(93.98,22.86) 0(93.98,25.4) 0(93.98,27.94) 0(93.98,30.48) 0(93.98,33.02) 0(93.98,35.56) 0(93.98,38.1) 0(93.98,40.64) 0(93.98,43.18) 0(93.98,45.72) 0(93.98,48.26) 0(93.98,50.8) 0(93.98,53.34) 0(93.98,55.88) 0(93.98,58.42) 0(93.98,60.96) 0(93.98,63.5) 0(93.98,66.04) 0(93.98,68.58) 0(93.98,71.12) 0(93.98,73.66) 0(93.98,76.2) 0(93.98,78.74) 0(93.98,81.28) 0(93.98,83.82) 0(93.98,86.36) 0(93.98,88.9) 0(96.52,12.7) 0(96.52,15.24) 0(96.52,17.78) 0(96.52,20.32) 0(96.52,22.86) 0(96.52,25.4) 0(96.52,27.94) 0(96.52,30.48) 0(96.52,33.02) 0(96.52,35.56) 0(96.52,38.1) 0(96.52,40.64) 0(96.52,43.18) 0(96.52,45.72) 0(96.52,48.26) 0(96.52,50.8) 0(96.52,53.34) 0(96.52,55.88) 0(96.52,58.42) 0(96.52,60.96) 0(96.52,63.5) 0(96.52,66.04) 0(96.52,68.58) 0(96.52,71.12) 0(96.52,73.66) 0(96.52,76.2) 0(96.52,78.74) 0(96.52,81.28) 0(96.52,83.82) 0(96.52,86.36) 0(96.52,88.9) 0(99.06,12.7) 0(99.06,15.24) 0(99.06,17.78) 0(99.06,20.32) 0(99.06,22.86) 0(99.06,25.4) 0(99.06,27.94) 0(99.06,30.48) 0(99.06,33.02) 0(99.06,35.56) 0(99.06,38.1) 0(99.06,40.64) 0(99.06,43.18) 0(99.06,45.72) 0(99.06,48.26) 0(99.06,50.8) 0(99.06,53.34) 0(99.06,55.88) 0(99.06,58.42) 0(99.06,60.96) 0(99.06,63.5) 0(99.06,66.04) 0(99.06,68.58) 0(99.06,71.12) 0(99.06,73.66) 0(99.06,76.2) 0(99.06,78.74) 0(99.06,81.28) 0(99.06,83.82) 0(99.06,86.36) 0(99.06,88.9) 0(101.6,12.7) 0(101.6,15.24) 0(101.6,17.78) 0(101.6,20.32) 0(101.6,22.86) 0(101.6,25.4) 0(101.6,27.94) 0(101.6,30.48) 0(101.6,33.02) 0(101.6,35.56) 0(101.6,38.1) 0(101.6,40.64) 0(101.6,43.18) 0(101.6,45.72) 0(101.6,48.26) 0(101.6,50.8) 0(101.6,53.34) 0(101.6,55.88) 0(101.6,58.42) 0(101.6,60.96) 0(101.6,63.5) 0(101.6,66.04) 0(101.6,68.58) 0(101.6,71.12) 0(101.6,73.66) 0(101.6,76.2) 0(101.6,78.74) 0(101.6,81.28) 0(101.6,83.82) 0(101.6,86.36) 0(101.6,88.9) 0(104.14,12.7) 0(104.14,15.24) 0(104.14,17.78) 0(104.14,20.32) 0(104.14,22.86) 0(104.14,25.4) 0(104.14,27.94) 0(104.14,30.48) 0(104.14,33.02) 0(104.14,35.56) 0(104.14,38.1) 0(104.14,40.64) 0(104.14,43.18) 0(104.14,45.72) 0(104.14,48.26) 0(104.14,50.8) 0(104.14,53.34) 0(104.14,55.88) 0(104.14,58.42) 0(104.14,60.96) 0(104.14,63.5) 0(104.14,66.04) 0(104.14,68.58) 0(104.14,71.12) 0(104.14,73.66) 0(104.14,76.2) 0(104.14,78.74) 0(104.14,81.28) 0(104.14,83.82) 0(104.14,86.36) 0(104.14,88.9)
  round 5.6 hole 4.22: 0(6.69,25) 0(22.69,87) 0(121.69,87) 0(137.69,13)
  round 3.048 hole 1.778: 0(7.925,11.887) 0(7.925,15.85) 0(7.925,31.699) 0(7.925,35.662) 0(7.925,39.624) 0(7.925,43.586) 0(7.925,47.549) 0(7.925,51.511) 0(7.925,55.474) 0(7.925,59.436) 0(11.887,11.887) 0(11.887,15.85) 0(11.887,19.812) 0(11.887,23.774) 0(11.887,27.737) 0(11.887,31.699) 0(11.887,35.662) 0(11.887,39.624) 0(11.887,43.586) 0(11.887,47.549) 0(11.887,51.511) 0(11.887,55.474) 0(11.887,59.436) 0(15.85,11.887) 0(15.85,15.85) 0(15.85,19.812) 0(15.85,23.774) 0(15.85,27.737) 0(15.85,31.699) 0(15.85,35.662) 0(15.85,39.624) 0(15.85,43.586) 0(15.85,47.549) 0(15.85,51.511) 0(15.85,55.474) 0(15.85,59.436) 0(19.812,11.887) 0(19.812,15.85) 0(19.812,19.812) 0(19.812,23.774) 0(19.812,27.737) 0(19.812,31.699) 0(19.812,35.662) 0(19.812,39.624) 0(19.812,43.586) 0(19.812,47.549) 0(19.812,51.511) 0(19.812,55.474) 0(19.812,59.436) 0(23.774,11.887) 0(23.774,15.85) 0(23.774,19.812) 0(23.774,23.774) 0(23.774,27.737) 0(23.774,31.699) 0(23.774,35.662) 0(23.774,39.624) 0(23.774,43.586) 0(23.774,47.549) 0(23.774,51.511) 0(23.774,55.474) 0(23.774,59.436) 0(27.737,11.887) 0(27.737,15.85) 0(27.737,19.812) 0(27.737,23.774) 0(27.737,27.737) 0(27.737,31.699) 0(27.737,35.662) 0(27.737,39.624) 0(27.737,43.586) 0(27.737,47.549) 0(27.737,51.511) 0(27.737,55.474) 0(27.737,59.436) 0(31.699,11.887) 0(31.699,15.85) 0(31.699,19.812) 0(31.699,23.774) 0(31.699,27.737) 0(31.699,31.699) 0(31.699,35.662) 0(31.699,39.624) 0(31.699,43.586) 0(31.699,47.549) 0(31.699,51.511) 0(31.699,55.474) 0(31.699,59.436) 0(35.662,11.887) 0(35.662,15.85) 0(35.662,19.812) 0(35.662,23.774) 0(35.662,27.737) 0(35.662,31.699) 0(35.662,35.662) 0(35.662,39.624) 0(35.662,43.586) 0(35.662,47.549) 0(35.662,51.511) 0(35.662,55.474) 0(35.662,59.436) 0(39.624,11.887) 0(39.624,15.85) 0(39.624,19.812) 0(39.624,23.774) 0(39.624,27.737) 0(39.624,31.699) 0(39.624,35.662) 0(39.624,39.624) 0(39.624,43.586) 0(39.624,47.549) 0(39.624,51.511) 0(39.624,55.474) 0(39.624,59.436) 0(43.586,11.887) 0(43.586,15.85) 0(43.586,19.812) 0(43.586,23.774) 0(43.586,27.737) 0(43.586,31.699) 0(43.586,35.662) 0(43.586,39.624) 0(43.586,43.586) 0(43.586,47.549) 0(43.586,51.511) 0(43.586,55.474) 0(43.586,59.436) 0(47.549,11.887) 0(47.549,15.85) 0(47.549,19.812) 0(47.549,23.774) 0(47.549,27.737) 0(47.549,31.699) 0(47.549,35.662) 0(47.549,39.624) 0(47.549,43.586) 0(47.549,47.549) 0(47.549,51.511) 0(47.549,55.474) 0(47.549,59.436) 0(51.511,11.887) 0(51.511,15.85) 0(51.511,19.812) 0(51.511,23.774) 0(51.511,27.737) 0(51.511,31.699) 0(51.511,35.662) 0(51.511,39.624) 0(51.511,43.586) 0(51.511,47.549) 0(51.511,51.511) 0(51.511,55.474) 0(51.511,59.436) 0(55.474,11.887) 0(55.474,15.85) 0(55.474,19.812) 0(55.474,23.774) 0(55.474,27.737) 0(55.474,31.699) 0(55.474,35.662) 0(55.474,39.624) 0(55.474,43.586) 0(55.474,47.549) 0(55.474,51.511) 0(55.474,55.474) 0(55.474,59.436) 0(115.57,82.55) 0(115.57,88.9)
  round 4 hole 4.22: 2(147.195,5.563) 2(147.195,94.463)

## Via types
v1: diameter 0.61, hole 0.254, Top Layer (*.GTL) to Bottom Layer (*GBL), 10 vias
v2: diameter 0.762, hole 0.381, Top Layer (*.GTL) to Bottom Layer (*GBL), 9 vias
v3: diameter 1.27, hole 0.711, Top Layer (*.GTL) to Bottom Layer (*GBL), 3 vias
v4: diameter 0.508, hole 0.254, Top Layer (*.GTL) to Bottom Layer (*GBL), 1 vias
v5: diameter 0.813, hole 0.508, Top Layer (*.GTL) to Bottom Layer (*GBL), 1 vias

## Nets (pads, with @x,y where several pads share a name; then routed paths per layer and width w, separated by ;. In a path a pad name is that pad's centre, name@x,y a point inside that pad or via, vN(x,y) a via of type N, cw(c..) or ccw(c..) an arc to the next point about the centre after c; other vN are vias at no path point)
+3.3V_BKPL: C18.1 C19.1 P1.11 Q1.2 S1.3 U8.8 U9.8 | length 82
  Top Layer (*.GTL) w0.254: C19.1@116.069,16.49 116.156,16.577 U9.8@118.736,16.577 118.736,17.964 117.745,18.954 117.745,19.513 ; C18.1@116.323,26.396 116.394,26.325 117.745,26.325 ; v1(116.501,19.513) 117.745,19.513 ; Q1.2@121.717,45.249 121.717,49.301 v2(121.717,54.458) ; 121.717,49.911 121.717,49.454 116.688,44.425 116.688,29.286 118.65,27.324 U8.8@118.65,26.325 117.745,26.325 ; v1(130.191,19.462) 130.211,19.443 S1.3@130.211,17.859 ; 117.745,19.513 117.745,26.325
  Top Layer (*.GTL) w0.508: Q1.2@121.592,45.125 Q1.2@121.717,45.249
  Bottom Layer (*GBL) w0.254: v1(116.501,19.513) 116.552,19.462 v1(130.191,19.462)
  Bottom Layer (*GBL) w0.508: v2(121.717,54.458) 133.312,54.458 P1.11@135.23,52.54
+24V: F1.1 P1.13 P1.14 TP2.1 | length 5
  Top Layer (*.GTL) w1.27: P1.13@140.31,34.125 P1.13@140.437,33.998 ; TP2.1@144.39,14.58 v5(144.39,19.406)
+24V_FUSED: P2.1 P2.3 pad.0@115.57,88.9 Q2.2
GND: C18.2 C19.2 P1.10 P1.12 P1.15 P1.16 P2.2 P3.2 P3.3 P3.4 P3.5 pad.0@115.57,82.55 pad.2 R2.1 S1.1 TP1.1 U8.4 U9.1 U9.2 U9.3 U9.4 U10.3 | length 22.4
  Top Layer (*.GTL) w0.254: C18.2@116.323,24.11 116.323,22.637 v1(116.348,22.612) ; v2(117.932,14.224) 117.913,14.204 C19.2@116.069,14.204 116.069,12.477 116.969,11.577 U9.1@118.736,11.577 U9.2@120.006,11.577 U9.3@121.276,11.577 U9.4@122.546,11.577 ; v3(118.112,39.689) 118.189,39.613 U10.3@119.408,39.613 ; U8.4@120.6,20.625 121.459,20.625 v1(121.479,20.605) ; v1(128.083,14.331) 128.111,14.359 S1.1@130.211,14.359
  Top Layer (*.GTL) w1.27: v2(136,17.383) TP1.1@136,19.443
  Bottom Layer (*GBL) w0.254: R2.1@129.032,64.285 130.279,64.285 131.229,63.335 P1.16@132.69,63.335
GPS_DATA: P1.1 P3.1 | length 35.6
  Top Layer (*.GTL) w0.254: P1.1@140.31,47.46 140.31,46.46 141.69,45.08 v2(141.69,32)
  Bottom Layer (*GBL) w0.254: P3.1@122.42,31.27 140.96,31.27 v2(141.69,32)
I2C_SCL: U8.6 U9.6 | length 10.9
  Top Layer (*.GTL) w0.254: U8.6@119.95,26.325 119.95,24.547 121.276,23.221 121.276,21.926 122.038,21.164 122.038,20.374 121.276,19.612 U9.6@121.276,16.577
I2C_SDA: U8.3 U9.5 | length 9.7
  Top Layer (*.GTL) w0.254: U8.3@119.95,20.625 v1(119.95,22.124) ; U9.5@122.546,16.577 v1(122.546,22.155)
  Bottom Layer (*GBL) w0.254: v1(119.95,22.124) 119.981,22.155 v1(122.546,22.155)
NetC1_1: C1.1 Q2.1 R1.1 R2.2 | length 8.3
  Bottom Layer (*GBL) w0.254: Q2.1@122.58,64.238 122.58,62.722 123.303,61.999 C1.1@124.968,61.999 R1.1@127,61.999 R2.2@129.032,61.999
NetC1_2: C1.2 F1.2 Q2.3 R1.2 | length 8.2
  Bottom Layer (*GBL) w0.254: 119.8,65.024 120.691,65.915 123.338,65.915 C1.2@124.968,64.285 R1.2@127,64.285
NetP1_2: P1.2 U8.2 | length 42.8
  Top Layer (*.GTL) w0.254: U8.2@119.3,20.625 v1(119.3,22.81) ; v4(130.076,23.213) 130.076,43.663 131.219,44.806 135.116,44.806 P1.2@137.77,47.46
  Bottom Layer (*GBL) w0.254: v1(119.3,22.81) 119.703,23.213 v4(130.076,23.213)
NetP1_5: P1.5 U8.5 | length 38.8
  Top Layer (*.GTL) w0.254: U8.5@120.6,26.325 120.691,26.416 v2(121.285,26.416) ; v2(132.563,26.467) 132.563,28.423 136.5,32.36 136.5,44.175 138.971,46.646 139,46.646 139,48.677 140.31,49.987 P1.5@140.31,50
  Bottom Layer (*GBL) w0.254: v2(121.285,26.416) 121.336,26.467 v2(132.563,26.467)
NetQ1_3: Q1.3 U10.2 | length 4.5
  Top Layer (*.GTL) w0.254: Q1.3@119.408,44.185 119.408,42.737 U10.2@121.592,40.553
NetS1_2: S1.2 U9.7 | length 10.1
  Top Layer (*.GTL) w0.254: U9.7@120.006,16.577 120.057,16.628 v1(120.057,18.268) ; v1(126.305,18.243) 126.311,18.237 S1.2@126.311,16.109
  Bottom Layer (*GBL) w0.254: v1(120.057,18.268) 120.082,18.243 v1(126.305,18.243)
SILICON_SN: P1.6 U10.1 | length 26.4
  Top Layer (*.GTL) w0.254: U10.1@121.592,38.673 123.151,38.673 125.095,40.617 v3(125.095,48.997)
  Bottom Layer (*GBL) w0.254: v3(125.095,48.997) 125.832,48.26 130.531,48.26 130.937,48.666 136.436,48.666 P1.6@137.77,50
~CS_SLOT: P1.9 Q1.1 U8.1 U8.7 | length 59.8
  Top Layer (*.GTL) w0.254: U8.1@118.65,20.625 118.65,23.415 119.3,24.065 U8.7@119.3,26.325 v2(119.3,28.346) ; Q1.1@121.592,43.245 v3(123.065,43.245) ; v2(128.473,28.448) 128.933,28.908 128.933,49.858 130.383,51.308 139.078,51.308 P1.9@140.31,52.54
  Bottom Layer (*GBL) w0.254: v2(119.3,28.346) 128.372,28.346 v2(128.473,28.448) ; v3(123.065,43.245) 124.703,43.245 127.406,45.949 v2(128.956,45.949)
pads on no net: P1.0 P1.3 P1.4 P1.7 P1.8